# Altium PCB UmbilicalBoardV2.PcbDoc
Units mm, origin at the board's own origin, x right, y up, seen from the top; angles counter-clockwise.
Board outline 92 x 96 mm, 6 copper layers (Top Layer, GndPlane, MidLayer1, MidLayer2, PwrPlane, Bottom Layer), stack 1.174 mm thick; 34 components, 29 nets, 299 pads, 5 vias.
Unrouted connection lines stored in the file: 6.
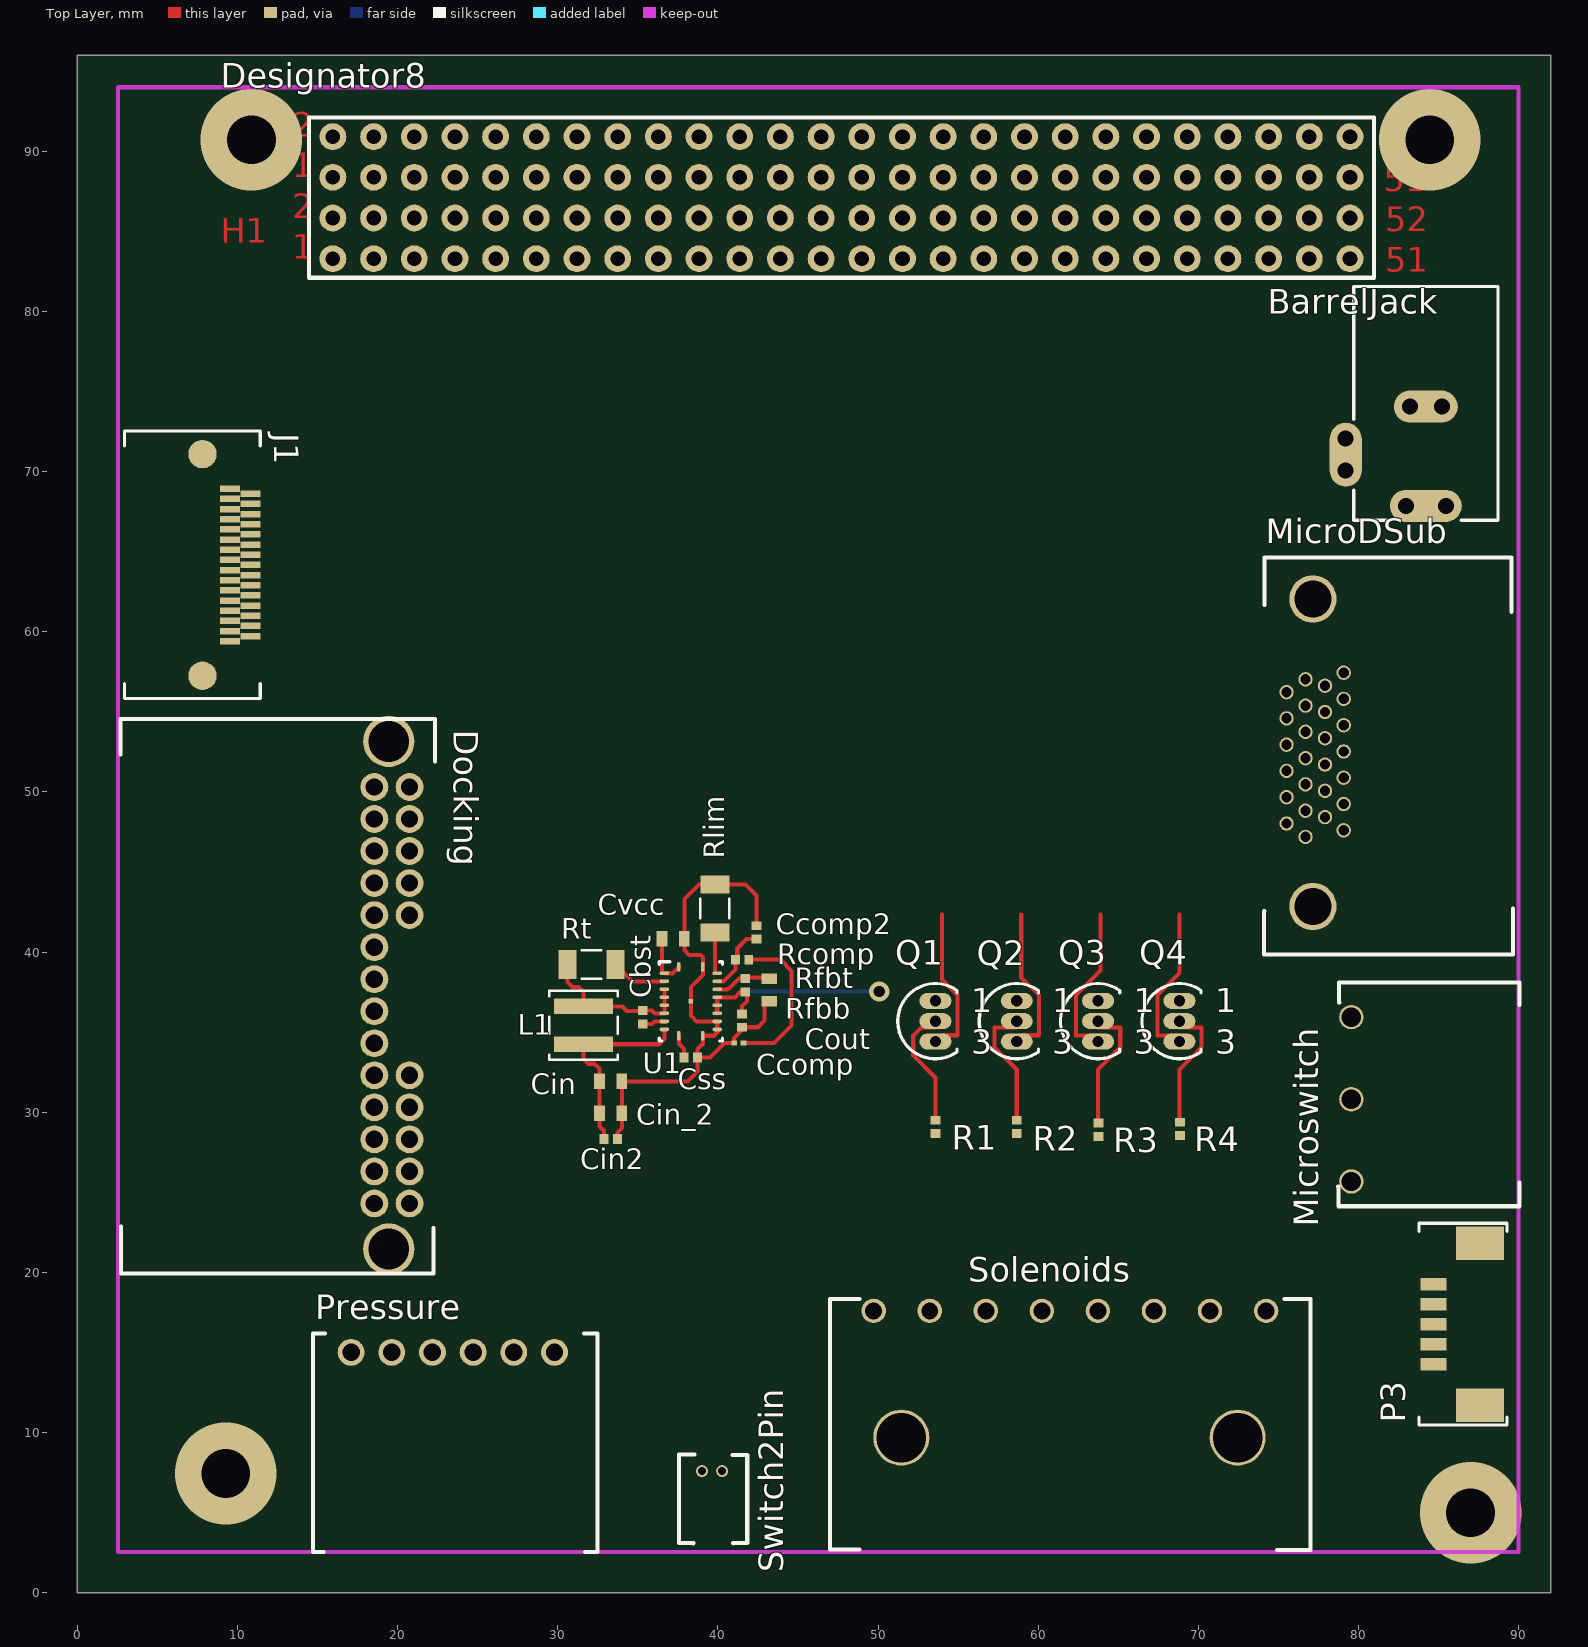
[diagram p0: Top Layer view]
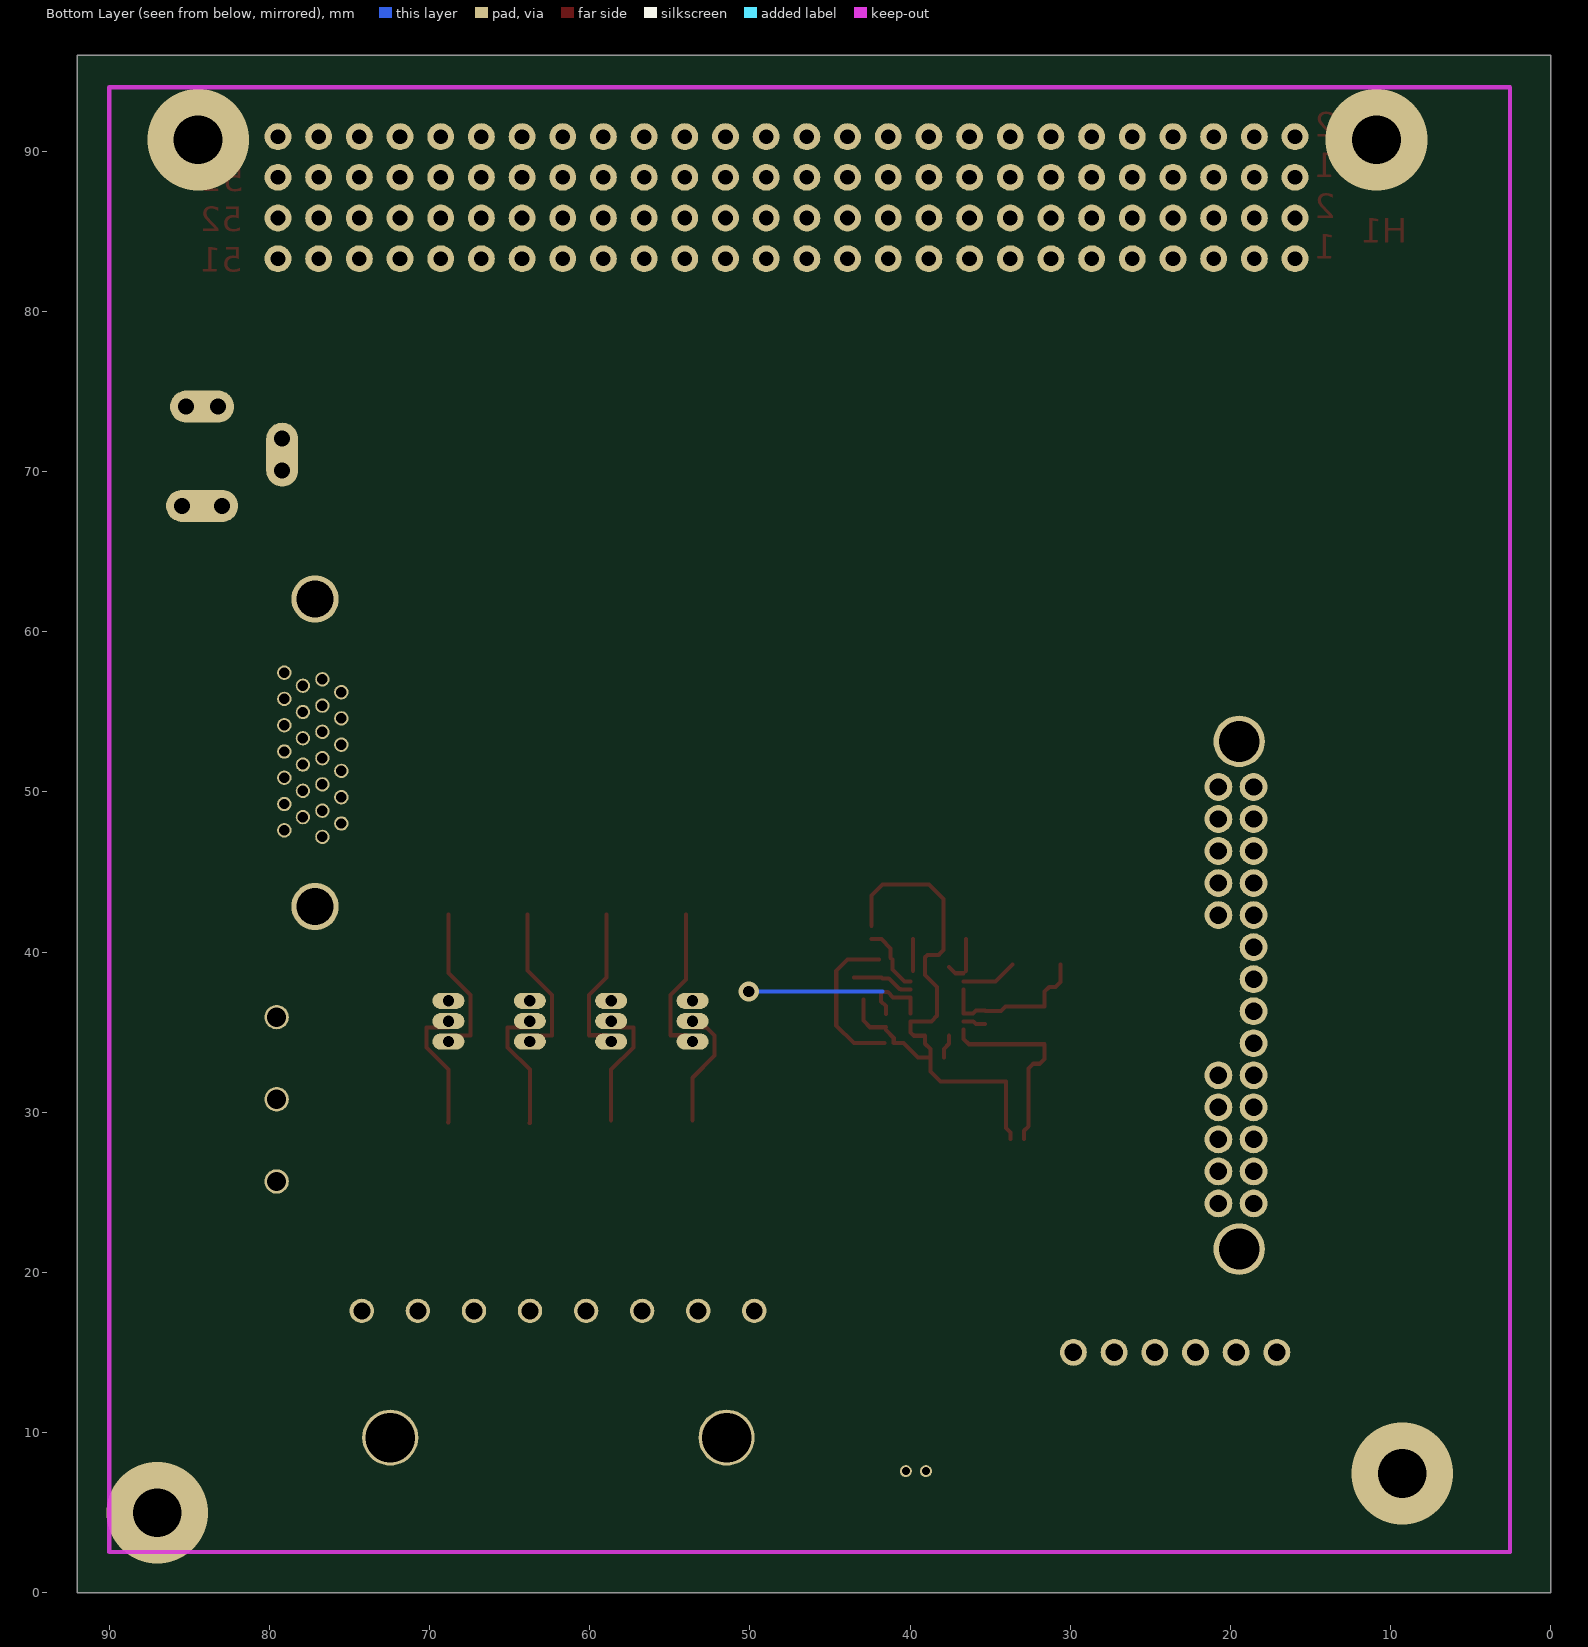
[diagram p1: Bottom Layer view, seen from below]
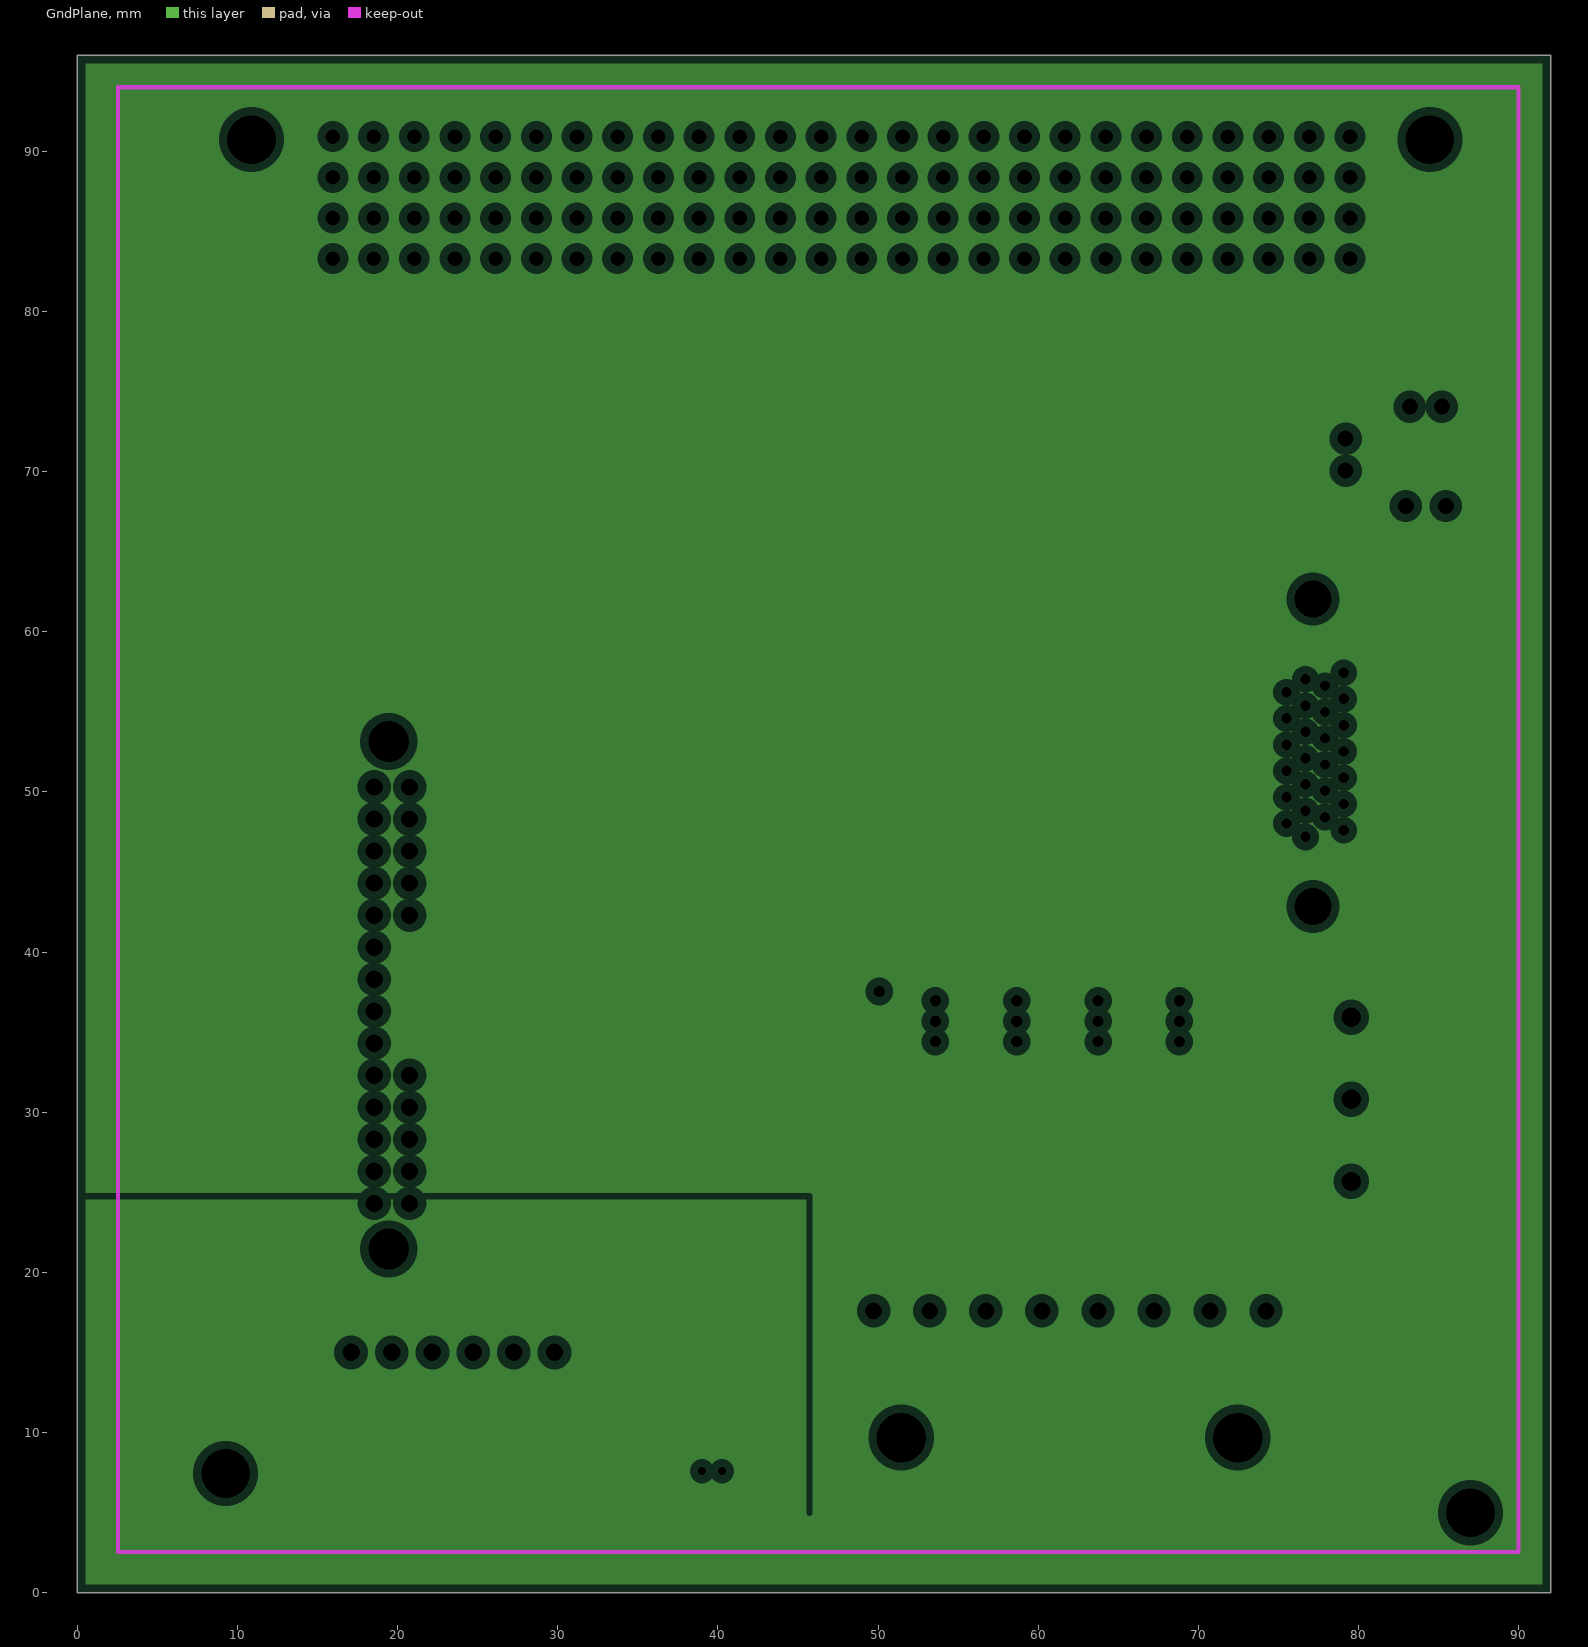
[diagram p2: GndPlane, clearances drawn from the general rule]
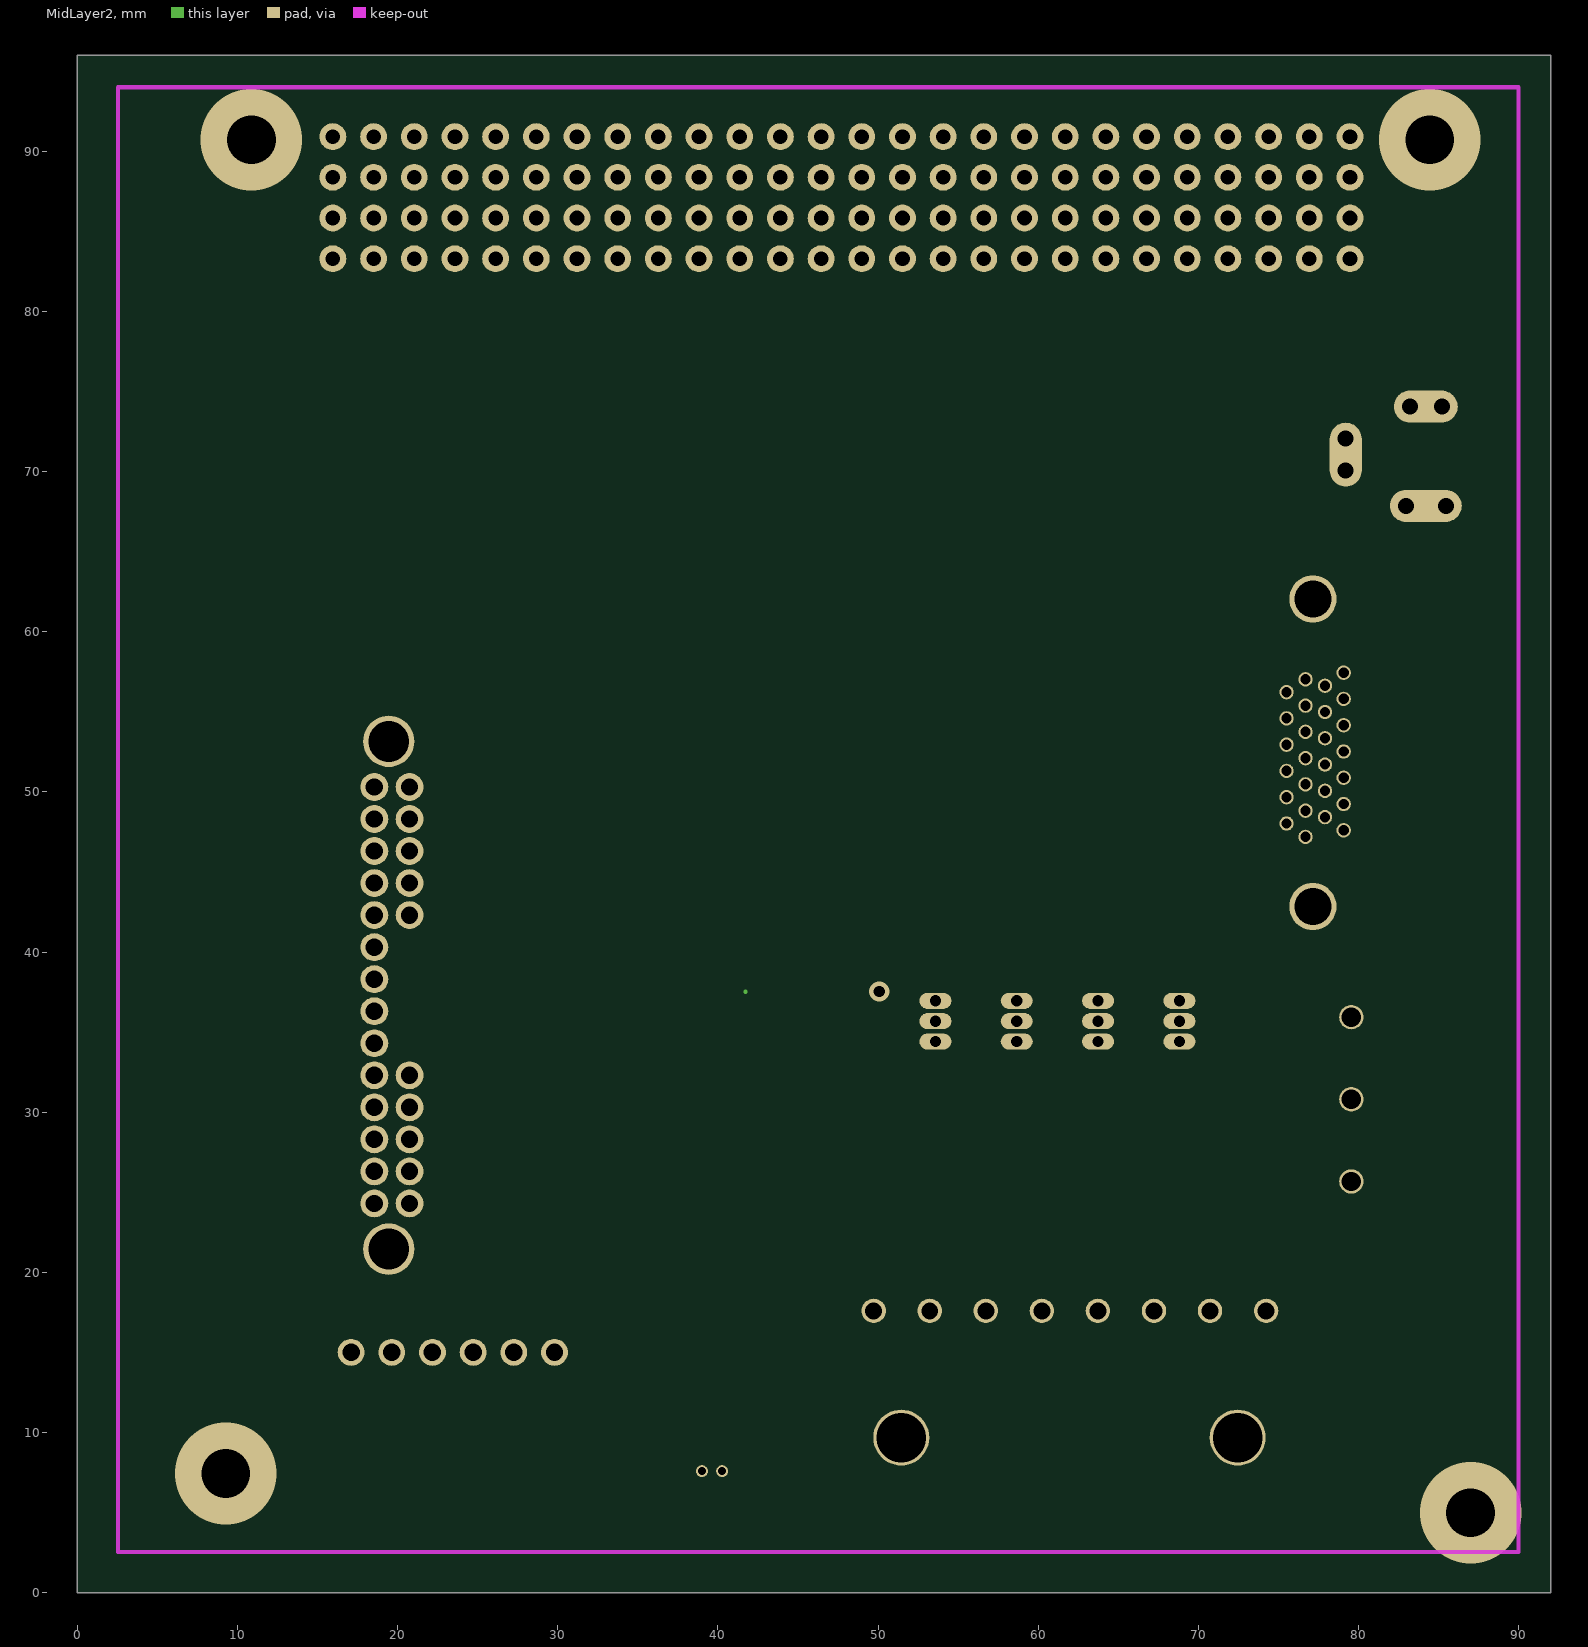
[diagram p3: MidLayer2]
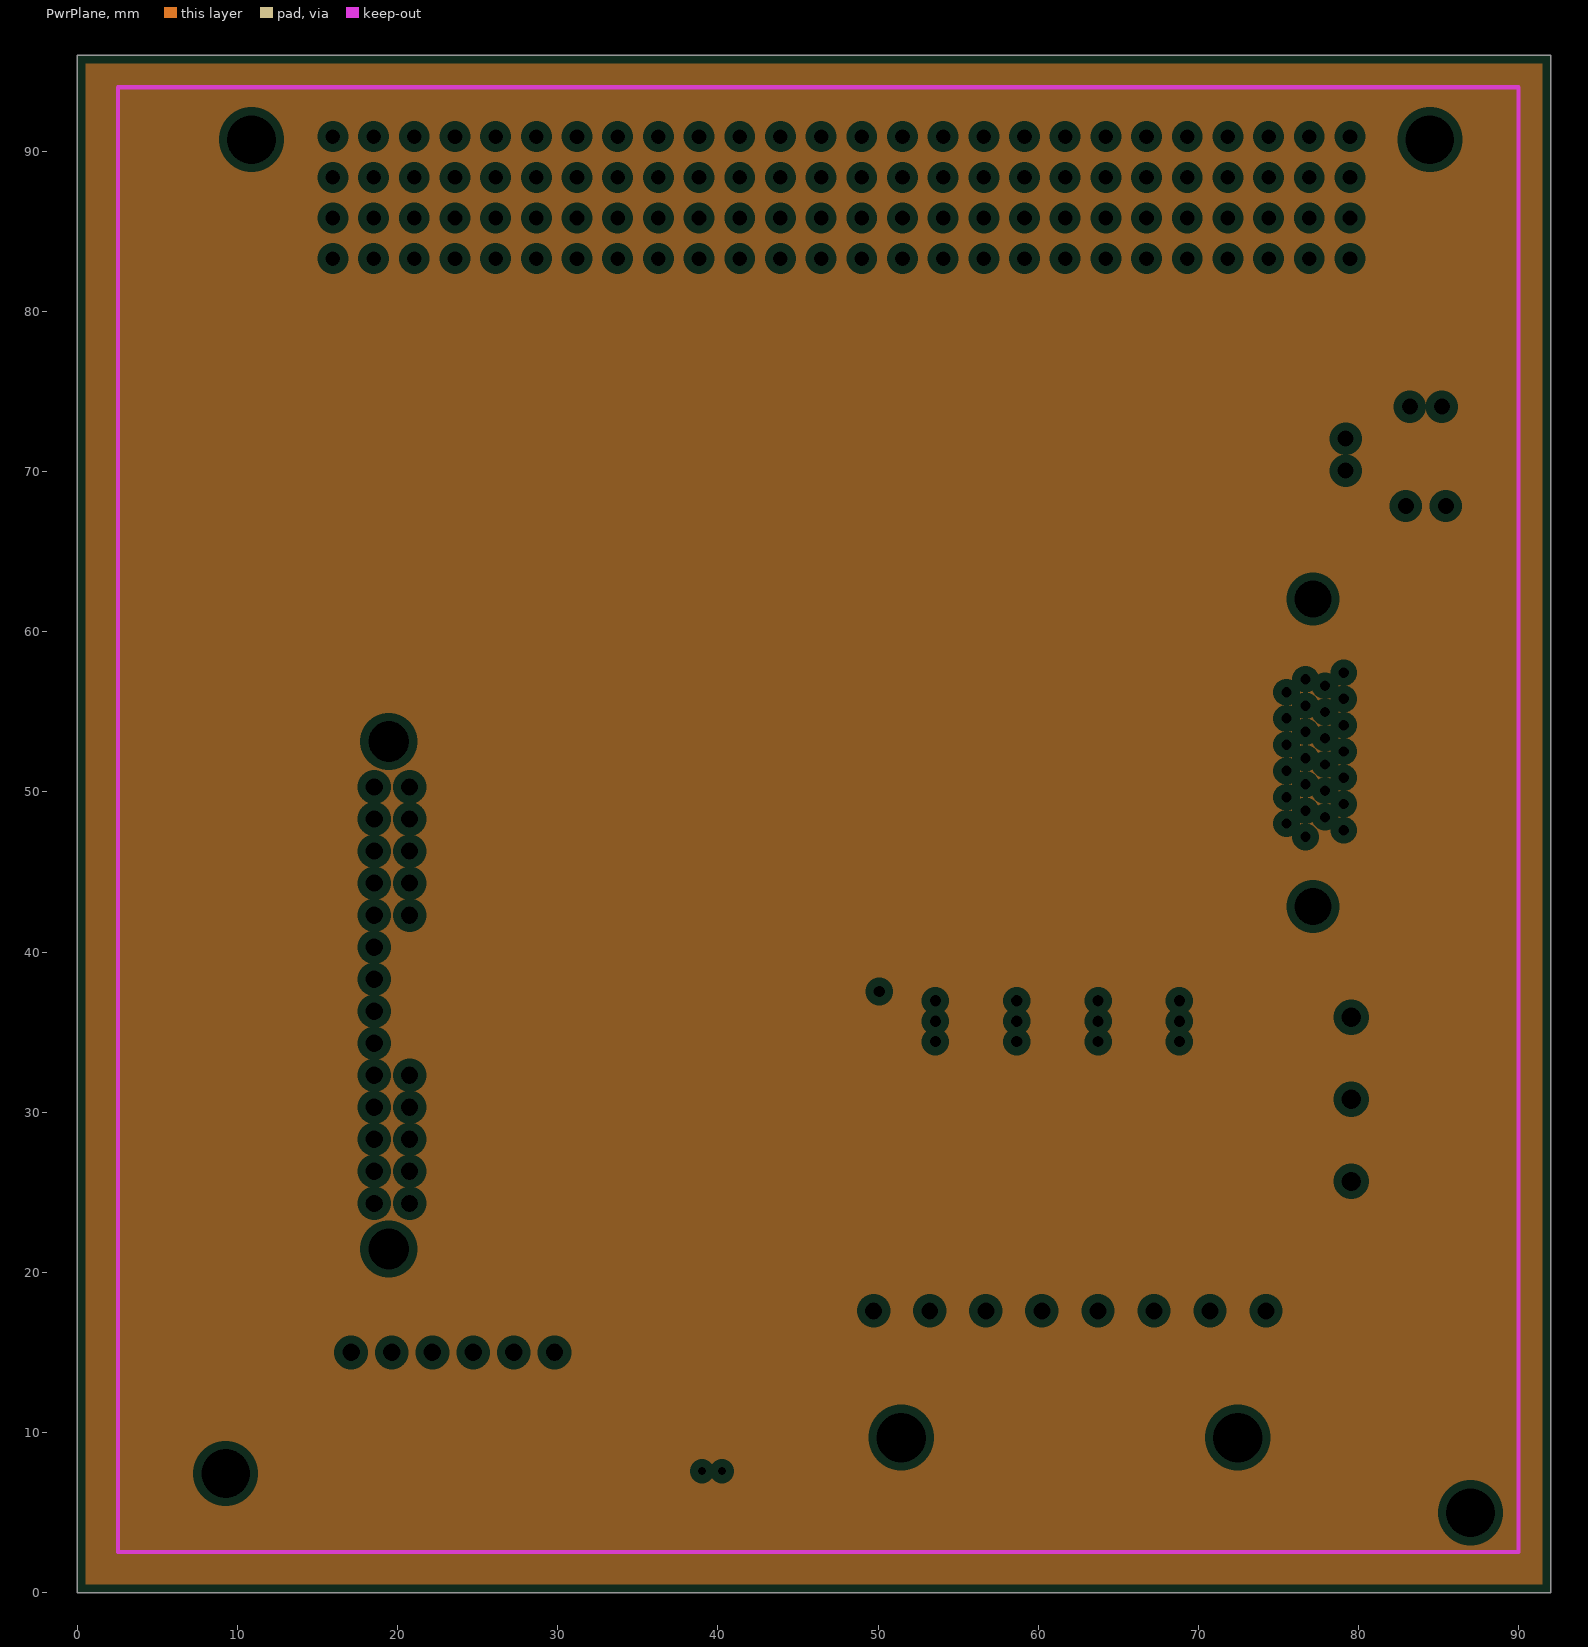
[diagram p4: PwrPlane, clearances drawn from the general rule]

## Layer stack, top to bottom
Top Solder: solder mask 0.0102, Solder Resist, Dk 3.5
Top Layer: signal copper 0.0356
Dielectric1: core 0.32, FR-4, Dk 4.8
GndPlane: plane copper 0.036, net DGND
MidLayer1: signal copper 0.0356
Dielectric2: prepreg 0.32, FR-4, Dk 4.8
MidLayer2: signal copper 0.0356
PwrPlane: plane copper 0.036
Dielectric3: core 0.32, FR-4, Dk 4.8
Bottom Layer: signal copper 0.0356
Bottom Solder: solder mask 0.0102, Solder Resist, Dk 3.5

## Board outline
0,0 0,35 0,40 0,52.019 0,65 0,70 0,96 30,96 32,96 47.6,96 63,96 65,96 92,96 92,70 92,65 92,40 92,35 92,0 65,0 60,0 35,0 30,0

## Design rules (kind name [scope] priority, off if disabled: settings)
Clearance [All] p1: gap=0.254
PlaneClearance [All] p1: clearance=0.508
PlaneConnect [All] p1: planeconnectstyle=Direct reliefexpansion=0.508 reliefentries=4 reliefconductorwidth=0.254 reliefairgap=0.254
PolygonConnect [All] p1: connectstyle=Direct reliefconductorwidth=0.254 reliefentries=4 polygonreliefangle="90 Angle" airgapwidth=0.254
RoomDefinition "Solenoid Switching" [InComponentClass('Solenoid Switching')] p1: confinementstyle=ConfineIn formatcopy=TRUE lockcomponents=FALSE outline -37.77,-93.904 31.064,-93.904 31.064,-79.426 -37.77,-79.426
RoomDefinition BoostConverter [InComponentClass('BoostConverter')] p2: confinementstyle=ConfineIn formatcopy=TRUE lockcomponents=FALSE outline -100,-100 -49.2,-100 -49.2,-74.6 -100,-74.6
RoutingVias [All] p1: holewidth=0.711 width=1.27 viastyle="Through Hole" minholewidth=0.711 minwidth=1.27 maxholewidth=0.711 maxwidth=1.27
SolderMaskExpansion [All] p1: expansion=0.102
Width [All] p1: maxlimit=0.254 minlimit=0.254 preferedwidth=0.254
28 further rules are at their usual default settings.

## Classes and differential pairs
component class "Solenoid Switching": Q1 Q2 Q3 Q4 R1
component class BoostConverter: Cbst Ccomp Ccomp2 Cin Cin2 Cin_2 Cout Css Cvcc Iout_1 L1 Rcomp Rfbb Rfbt Rlim Rt U1 Vin
component class TopSheet: BarrelJack

## Components (designator, comment, footprint, x,y, rotation, side; value= is the part's Value field where it differs from the comment)
BarrelJack "Umbilical PWR" KLD-0202 84.201,81.559 r270 top (schematic designator J2)
Cbst "C1005X5R1A104K" 1005 35.311,35.93 r270 top
Ccomp "02013A220GAT2A" 0201 41.311,34.33 r180 top
Ccomp2 "CL02C100JO2ANNC" 01005 42.411,41.23 r270 top
Cin "GRM188R61C106MA7" 0603 33.311,31.93 r0 top
Cin2 "GRM155R61C104KA8" 0402 33.311,28.33 r0 top
Cin_2 "GRM188R61C106MA7" 0603 33.311,29.93 r0 top
Cout "C3216X5R1E226M" 1005 41.511,35.73 r270 top
Css "GRM155R71C822KA0" 0402 38.311,33.43 r180 top
Cvcc "C1608X5R1A105K" 1608 37.211,40.83 r180 top
Designator8 "Comment" PC-104FOOTPRINT 15.965,83.295 r0 top locked
Docking "Part Number: 34826-0240. 24 Pin." "Docking Connector" 20.726,48.336 r270 top
J1 "XACT Connector" "Airborn Nano" 7.823,71.095 r270 top
L1 "XAL4020-601MEB" XAL4020 31.611,35.43 r90 top
MicroDSub "53048-0210 Molex Picoblade" MicroDSub 79.07,52.527 r270 top
Microswitch "USB_B" MicroSwitch_3pin 79.502,30.861 r270 top
P3 "Piksi UARTB" "Molex Picoblade 5 Pin" 89.078,10.668 r90 top
Pressure "Piksi USB" "Pressure Transducer" 22.53,14.884 r0 top
Q1 "NPN" TO-92 53.581,35.69 r0 top
Q2 "NPN" TO-92 58.661,35.69 r0 top
Q3 "NPN" TO-92 63.741,35.69 r0 top
Q4 "NPN" TO-92 68.821,35.69 r0 top
R1 "Res1" 0402 53.581,29.086 r270 top
R2 "Res1" 0402 58.661,29.086 r90 top
R3 "Res1" 0402 63.766,28.908 r90 top
R4 "Res1" 0402 68.846,28.959 r90 top
Rcomp "CRCW040249K9FKED" 0402 41.511,39.53 r0 top
Rfbb "RC0603FR-0782KL" 0603 43.211,37.63 r270 top
Rfbt "CRCW0402732KFKED" 0402 41.711,37.93 r90 top
Rlim "ERJ-8ENF1133V" 1206 39.811,42.73 r90 top
Rt "RC1206FR-0782KL" 1206 32.111,39.23 r0 top
Solenoids "Part Number: 172310-1108" "Solenoids 8Pin Right Angle" 63.729,17.602 r0 top
Switch2Pin "53048-0210 Molex Picoblade" "RemoverBeforeFlight Switch" 37.059,7.595 r0 top
U1 "TPS61088RHLR" RHL0020A 38.311,36.93 r0 top

## Footprints (in the part's own frame and the unit in brackets; to place one, negate y for a bottom-side part, rotate by r counter-clockwise, add the part's x,y. Pads: shape width x height; smd on the part's side, far side on the other; paste and mask are expansions set on the pad)
0201 [mil]
  rect 14x13 smd: 1(-11.5,0) 2(11.5,0)
0402 [mil]
  rect 22x24 smd: 1(-16.5,0) 2(16.5,0)
0603 [mil]
  rect 26x38 smd: 1(-27.5,0) 2(27.5,0)
1005 [mil]
  rect 22x24 smd: 1(-16.5,0) 2(16.5,0)
01005 [mil]
  rect 22x24 smd: 1(-16.5,0) 2(16.5,0)
1206 [mil]
  rect 44x71 smd: 1(-59,0) 2(59,0)
  silkscreen extent -24,-36 24,36
1608 [mil]
  rect 26x38 smd: 1(-27.5,0) 2(27.5,0)
"Airborn Nano" [mil] "31 Pin connector used for XACT"
  round 70 smd: 0(0,0) 32(545,0)
  rect 16x49 smd: 1(85,67.5) 2(110,67.5) 3(135,67.5) 4(160,67.5) 5(185,67.5) 6(210,67.5) 7(235,67.5) 8(260,67.5) 9(285,67.5) 10(310,67.5) 11(335,67.5) 12(360,67.5) 13(385,67.5) 14(410,67.5) 15(435,67.5) 16(460,67.5) 17(97.5,117.5) 18(122.5,117.5) 19(147.5,117.5) 20(172.5,117.5) 21(197.5,117.5) 22(222.5,117.5) 23(247.5,117.5) 24(272.5,117.5) 25(297.5,117.5) 26(322.5,117.5) 27(347.5,117.5) 28(372.5,117.5) 29(397.5,117.5) 30(422.5,117.5) 31(447.5,117.5)
  silkscreen extent -57,-192 601,142, body extent -53,-188 597,138, height 138
"Docking Connector" [mm] "Part Number: 34826-0240"
  round 1.74 hole 1.08 mask+0.076: 2(-1.975,0.025) 2(-1.975,-2.175) 2(0.025,0.025) 2(0.025,-2.175) 2(2.025,0.025) 2(2.025,-2.175) 2(4.025,0.025) 2(4.025,-2.175) 2(6.025,0.025) 2(6.025,-2.175) 2(8.025,-2.175) 2(10.025,-2.175) 2(12.025,-2.175) 2(14.025,-2.175) 2(16.025,-2.175) 2(16.025,0.025) 2(18.025,-2.175) 2(18.025,0.025) 2(20.025,-2.175) 2(20.025,0.025) 2(22.025,-2.175) 2(22.025,0.025) 2(24.025,-2.175) 2(24.025,0.025)
  round 3.21 hole 2.55 mask+0.076: 3(-4.825,-1.275) 3(26.875,-1.275)
  silkscreen extent -6.22,-18.03 28.41,1.6, body extent -6.22,-18 28.41,1.5, height 4.84
KLD-0202 [mm] "DC Power Jack, 2.5mm, KLD Series, PCB Mount"
  oval 2x4.5 all layers, no hole: 1(13.7,0)
  round 1.5 hole 1: 1A(13.7,-1.25) 1B(13.7,1.25) 2A(7.5,-1) 2B(7.5,1) 3A(9.5,-5) 3B(11.5,-5)
  oval 2x4 all layers, no hole: 2(7.5,0)
  oval 4x2 all layers, no hole: 3(10.5,-5)
  silkscreen extent 0,-4.5 14.6,4.5
MicroDSub [mm] "12226-5150-00FR"
  round 0.9 hole 0.65: 1(-4.92,0) 2(-3.28,0) 3(-1.64,0) 4(0,0) 5(1.64,0) 6(3.28,0) 7(4.92,0) 8(-4.105,-1.165) 9(-2.465,-1.165) 10(-0.825,-1.165) 11(0.815,-1.165) 12(2.455,-1.165) 13(4.095,-1.165) 14(-4.505,-2.38) 15(-2.865,-2.38) 16(-1.225,-2.38) 17(0.415,-2.38) 18(2.055,-2.38) 19(3.695,-2.38) 20(5.335,-2.38) 21(-3.705,-3.565) 22(-2.065,-3.565) 23(-0.425,-3.565) 24(1.215,-3.565) 25(2.855,-3.565) 26(4.495,-3.565)
  round 2.95 hole 2.3: 27(-9.52,-1.92) 28(9.68,-1.92)
  silkscreen extent -12.12,-4.98 12.67,10.58, body extent -12.2,-4.97 12.6,10.58, height 5
MicroSwitch_3pin [mm] "Omron Electronics Inc-EMC Div D2FS-FL-N-A1"
  round 1.524 hole 1.2: 1(-5.08,0.05) 2(0.05,0.05) 3(5.18,0.05)
  silkscreen extent -7.25,-0.77 6.73,10.55, body extent -7.25,-0.75 6.73,10.55
"Molex Picoblade 5 Pin" [mm] "Molex Picoblade Header, SMT, Right Angle"
  rect 2.1x3 smd: 1(1.05,1.5) 2(11.15,1.5)
  rect 0.8x1.6 smd: 3(3.6,4.4) 4(4.85,4.4) 5(6.1,4.4) 6(7.35,4.4) 7(8.6,4.4)
  silkscreen extent -0.2,-0.2 12.4,5.3, body extent 0.4,0 11.8,5.2, height 3.4
PC-104FOOTPRINT [mm]
  round 1.676 hole 0.914 mask+0.076: H1_1(0,0) H1_2(0,2.54) H1_3(2.54,0) H1_4(2.54,2.54) H1_5(5.08,0) H1_6(5.08,2.54) H1_7(7.62,0) H1_8(7.62,2.54) H1_9(10.16,0) H1_10(10.16,2.54) H1_11(12.7,0) H1_12(12.7,2.54) H1_13(15.24,0) H1_14(15.24,2.54) H1_15(17.78,0) H1_16(17.78,2.54) H1_17(20.32,0) H1_18(20.32,2.54) H1_19(22.86,0) H1_20(22.86,2.54) H1_21(25.4,0) H1_22(25.4,2.54) H1_23(27.94,0) H1_24(27.94,2.54) H1_25(30.48,0) H1_26(30.48,2.54) H1_27(33.02,0) H1_28(33.02,2.54) H1_29(35.56,0) H1_30(35.56,2.54) H1_31(38.1,0) H1_32(38.1,2.54) H1_33(40.64,0) H1_34(40.64,2.54) H1_35(43.18,0) H1_36(43.18,2.54) H1_37(45.72,0) H1_38(45.72,2.54) H1_39(48.26,0) H1_40(48.26,2.54) H1_41(50.8,0) H1_42(50.8,2.54) H1_43(53.34,0) H1_44(53.34,2.54) H1_45(55.88,0) H1_46(55.88,2.54) H1_47(58.42,0) H1_48(58.42,2.54) H1_49(60.96,0) H1_50(60.96,2.54) H1_51(63.5,0) H1_52(63.5,2.54) H2_1(0,5.08) H2_2(0,7.62) H2_3(2.54,5.08) H2_4(2.54,7.62) H2_5(5.08,5.08) H2_6(5.08,7.62) H2_7(7.62,5.08) H2_8(7.62,7.62) H2_9(10.16,5.08) H2_10(10.16,7.62) H2_11(12.7,5.08) H2_12(12.7,7.62) H2_13(15.24,5.08) H2_14(15.24,7.62) H2_15(17.78,5.08) H2_16(17.78,7.62) H2_17(20.32,5.08) H2_18(20.32,7.62) H2_19(22.86,5.08) H2_20(22.86,7.62) H2_21(25.4,5.08) H2_22(25.4,7.62) H2_23(27.94,5.08) H2_24(27.94,7.62) H2_25(30.48,5.08) H2_26(30.48,7.62) H2_27(33.02,5.08) H2_28(33.02,7.62) H2_29(35.56,5.08) H2_30(35.56,7.62) H2_31(38.1,5.08) H2_32(38.1,7.62) H2_33(40.64,5.08) H2_34(40.64,7.62) H2_35(43.18,5.08) H2_36(43.18,7.62) H2_37(45.72,5.08) H2_38(45.72,7.62) H2_39(48.26,5.08) H2_40(48.26,7.62) H2_41(50.8,5.08) H2_42(50.8,7.62) H2_43(53.34,5.08) H2_44(53.34,7.62) H2_45(55.88,5.08) H2_46(55.88,7.62) H2_47(58.42,5.08) H2_48(58.42,7.62) H2_49(60.96,5.08) H2_50(60.96,7.62) H2_51(63.5,5.08) H2_52(63.5,7.62)
  silkscreen extent -1.5,-1.19 65,8.81
"Pressure Transducer" [mm] "70553-0005"
  round 1.676 hole 1.09 mask+0.076: A1(-5.43,0.125) A2(-2.89,0.125) A3(-0.35,0.125) A4(2.19,0.125) A5(4.73,0.125) A6(7.27,0.125)
  Top Overlay keep-out lines w0.254: -7.158,-12.342 -7.802,-12.342 -7.802,1.311 -7.059,1.311 ; 9.12,1.295 9.945,1.295 9.945,-12.325 9.186,-12.325
  silkscreen extent -7.8,-12.34 9.95,1.31, body extent -7.83,-12.32 9.95,1.27, height 4.06
"RemoverBeforeFlight Switch" [mm] "Molex Picoblade Part Number: 53048-0210"
  round 0.75 hole 0.5: 1(1.95,0) 2(3.205,0)
  silkscreen extent 0.53,-4.5 4.78,1.05, body extent 0.53,-4.47 4.78,1.03, height 4.05
RHL0020A [mm]
  oval 0.24x0.6 smd: 1(-0.75,2.15) 10(-0.75,-2.15) 11(0.75,-2.15) 20(0.75,2.15)
  oval 0.6x0.24 smd: 2(-1.65,1.75) 3(-1.65,1.25) 4(-1.65,0.75) 5(-1.65,0.25) 6(-1.65,-0.25) 7(-1.65,-0.75) 8(-1.65,-1.25) 9(-1.65,-1.75) 12(1.65,-1.75) 13(1.65,-1.25) 14(1.65,-0.75) 15(1.65,-0.25) 16(1.65,0.25) 17(1.65,0.75) 18(1.65,1.25) 19(1.65,1.75)
  rect 0.3x0.3 smd: 21(0,0)
  silkscreen extent -1.98,-2.47 1.98,2.47
"Solenoids 8Pin Right Angle" [mm] "New Solenoid 8 Pin. Part Number: 172310-1108"
  round 1.524 hole 1.06: 1(-14,0) 2(-10.5,0) 3(-7,0) 4(-3.5,0) 5(0,0) 6(3.5,0) 7(7,0) 8(10.5,0)
  round 3.5 hole 3.09: 1(-12.275,-7.91) 1(8.725,-7.91)
  silkscreen extent -16.72,-14.92 13.28,0.75, body extent -16.72,-14.89 13.28,0.74, height 6.06
TO-92 [mm] "TO, Flat Index; 3 In-Line, Axial Leads; Body Dia. 4.6mm; Leads 0.41 x 0.39 mm (max)"
  oval 2x1 hole 0.7: 1(0,1.27) 2(0,0) 3(0,-1.27)
  silkscreen extent -2.34,-2.34 1.35,2.34
XAL4020 [mil]
  rect 38x146 smd: 1(-46.5,0) 2(46.5,0)
  silkscreen extent -84,-84 84,84

## Part data
BarrelJack: library part PWR2.5, "Low Voltage Power Supply Connector"
Cbst Ccomp Ccomp2 Cin Cin2 Cin_2 Cout Css Cvcc L1 Rcomp Rfbb Rfbt Rlim Rt: "Imported"
Q1 Q2 Q3 Q4: "NPN Bipolar Transistor"
R1 R2 R3 R4: "Resistor"

## Via types
v1: diameter 6.35, hole 3.048, Top Layer to Bottom Layer, 4 vias
v2: diameter 1.27, hole 0.711, Top Layer to Bottom Layer, 1 vias

## Nets (pads, with @x,y where several pads share a name; then routed paths per layer and width w, separated by ;. In a path a pad name is that pad's centre, name@x,y a point inside that pad or via, vN(x,y) a via of type N, cw(c..) or ccw(c..) an arc to the next point about the centre after c; other vN are vias at no path point)
0: Ccomp2.1 Ccomp.2 Cin2.2 Cin.2 Cin_2.2 Cout.2 Css.1 Cvcc.1 Rfbb.2 Rlim.2 U1.11 U1.12 U1.13 U1.20 U1.21 | length 36.6
  Top Layer w0.254: Cin2.2 33.73,28.749 34.009,29.028 Cin_2.2 Cin.2 38.111,31.93 38.73,32.549 Css.1 ; U1.13 U1.12 39.961,34.98 39.761,34.78 U1.11 39.061,34.28 38.73,33.949 Css.1 ; U1.13 38.661,35.68 38.311,36.03 U1.21 38.311,37.83 39.061,38.58 U1.20 39.061,39.68 38.911,39.83 38.211,39.83 37.909,40.131 Cvcc.1 37.909,43.328 38.809,44.228 Rlim.2 41.712,44.228 42.411,43.53 Ccomp2.1 ; Cout.2@41.511,35.13 41.018,34.637 Ccomp.2 40.411,34.33 39.511,33.43 Css.1 ; Cout.2 42.491,35.311 42.911,35.73 Rfbb.2@42.911,37.031
AGND: 
DGND: Q1.3 Q2.3 Q3.3 Q4.3
NetCbst_1: Cbst.1 L1.2 Rt.1 U1.4 U1.5 U1.6 U1.7 | length 10
  Top Layer w0.254: Rt.1 30.612,38.128 30.911,37.83 31.311,37.83 31.611,37.53 L1.2 34.03,36.611 34.311,36.33 35.292,36.33 Cbst.1 35.891,36.349 36.06,36.181 U1.7 U1.6 U1.5 U1.4
NetCbst_2: Cbst.2 U1.8 | length 1.4
  Top Layer w0.254: Cbst.2 35.891,35.511 36.054,35.673 36.265,35.673 ; 36.272,35.68 U1.8
NetCcomp2_2: Ccomp2.2 Rcomp.1 U1.18 | length 4.1
  Top Layer w0.254: U1.18 40.349,38.18 40.361,38.18 41.091,38.91 Rcomp.1 ; Rcomp.1@41.211,39.649 41.211,40.23 41.791,40.811 Ccomp2.2
NetCcomp_1: Ccomp.1 Rcomp.2 | length 9.8
  Top Layer w0.254: Ccomp.1 43.511,34.33 44.611,35.43 44.611,38.83 43.911,39.53 Rcomp.2
NetCin2_1: Cin2.1 Cin.1 Cin_2.1 L1.1 U1.9 | length 12.5
  Top Layer w0.254: Cin2.1 32.891,28.849 32.612,29.128 Cin_2.1 Cin.1 32.612,32.728 32.311,33.03 31.911,33.03 31.611,33.33 L1.1 36.33,34.249 36.661,34.58 U1.9@36.661,35.172
NetCout_1: Cout.1 Rfbt.1 U1.14 U1.15 U1.16 | length 12.7
  Top Layer w0.254: U1.14 U1.15 39.961,37.179 41.061,37.18 41.391,37.511 Rfbt.1 ; Cout.1 41.511,36.63 41.811,36.93 Rfbt.1@41.811,37.411
  MidLayer2 w0.254: 41.719,37.518 41.719,37.544
  Bottom Layer w0.254: 41.709,37.544 v2(50.075,37.544)
NetCss_2: Css.2 U1.10 | length 1.5
  Top Layer w0.254: U1.10 37.561,34.28 37.891,33.949 Css.2
NetCvcc_2: Cvcc.2 U1.1 U1.2 | length 3.1
  Top Layer w0.254: 36.512,38.836 Cvcc.2 ; U1.2 37.161,38.68 U1.1
NetJ2_1: BarrelJack.1 BarrelJack.1A BarrelJack.1B
NetJ2_2: BarrelJack.2 BarrelJack.2A BarrelJack.2B
NetJ2_3: BarrelJack.3 BarrelJack.3A BarrelJack.3B
NetQ1_1: Q1.1 | length 9.5
  Top Layer w0.254: 53.581,34.42 53.97,34.809 54.962,34.809 54.962,37.325 54,38.286 54,42.359
NetQ1_2: Q1.2 R1.1 | length 7.8
  Top Layer w0.254: R1.1 53.581,32.158 52.2,33.539 52.2,34.785 52.716,35.301 53.581,35.301 Q1.2
NetQ2_1: Q2.1 | length 9.6
  Top Layer w0.254: 58.661,34.42 58.94,34.699 58.94,34.809 60.042,34.809 60.042,37.325 58.94,38.426 58.94,42.359
NetQ2_2: Q2.2 R2.2 | length 8.1
  Top Layer w0.254: R2.2 58.661,32.674 57.28,34.055 57.28,35.301 58.661,35.301 Q2.2
NetQ3_1: Q3.1 | length 10.1
  Top Layer w0.254: 63.741,34.42 63.88,34.559 63.88,34.793 62.36,34.793 62.36,37.325 63.88,38.845 63.88,42.359
NetQ3_2: Q3.2 R3.2 | length 8.3
  Top Layer w0.254: Q3.2 63.741,35.301 65.122,35.301 65.122,34.055 63.741,32.674 63.741,29.327 R3.2
NetQ4_1: Q4.1 | length 9.9
  Top Layer w0.254: 68.821,34.42 68.821,34.793 67.44,34.793 67.44,37.325 68.821,38.706 68.821,42.359
NetQ4_2: Q4.2 R4.2 | length 8.3
  Top Layer w0.254: Q4.2 68.821,35.301 70.202,35.301 70.202,34.055 68.821,32.674 68.821,29.378 R4.2
NetR1_2: R1.2
NetR2_1: R2.1
NetR3_1: R3.1
NetR4_1: R4.1
NetRfbb_1: Rfbb.1 Rfbt.2 U1.17 | length 3.9
  Top Layer w0.254: U1.17 40.579,37.68 ; 40.587,37.688 40.669,37.688 41.33,38.349 Rfbt.2 ; Rfbt.2@41.79,38.428 42.711,38.428 ; Rfbb.1@42.911,38.428 42.711,38.428 ; Rfbb.1@43.511,38.428 42.711,38.428
NetRlim_1: Rlim.1 U1.19 | length 2
  Top Layer w0.254: 39.811,38.838 Rlim.1@39.811,40.831
NetRt_2: Rt.2 U1.3 | length 3.5
  Top Layer w0.254: Rt.2 34.659,38.18 36.272,38.18 U1.3
pads on no net: Designator8.H1_1 Designator8.H1_2 Designator8.H1_3 Designator8.H1_4 Designator8.H1_5 Designator8.H1_6 Designator8.H1_7 Designator8.H1_8 Designator8.H1_9 Designator8.H1_10 Designator8.H1_11 Designator8.H1_12 Designator8.H1_13 Designator8.H1_14 Designator8.H1_15 Designator8.H1_16 Designator8.H1_17 Designator8.H1_18 Designator8.H1_19 Designator8.H1_20 Designator8.H1_21 Designator8.H1_22 Designator8.H1_23 Designator8.H1_24 Designator8.H1_25 Designator8.H1_26 Designator8.H1_27 Designator8.H1_28 Designator8.H1_29 Designator8.H1_30 Designator8.H1_31 Designator8.H1_32 Designator8.H1_33 Designator8.H1_34 Designator8.H1_35 Designator8.H1_36 Designator8.H1_37 Designator8.H1_38 Designator8.H1_39 Designator8.H1_40 Designator8.H1_41 Designator8.H1_42 Designator8.H1_43 Designator8.H1_44 Designator8.H1_45 Designator8.H1_46 Designator8.H1_47 Designator8.H1_48 Designator8.H1_49 Designator8.H1_50 Designator8.H1_51 Designator8.H1_52 Designator8.H2_1 Designator8.H2_2 Designator8.H2_3 Designator8.H2_4 Designator8.H2_5 Designator8.H2_6 Designator8.H2_7 Designator8.H2_8 Designator8.H2_9 Designator8.H2_10 Designator8.H2_11 Designator8.H2_12 Designator8.H2_13 Designator8.H2_14 Designator8.H2_15 Designator8.H2_16 Designator8.H2_17 Designator8.H2_18 Designator8.H2_19 Designator8.H2_20 Designator8.H2_21 Designator8.H2_22 Designator8.H2_23 Designator8.H2_24 Designator8.H2_25 Designator8.H2_26 Designator8.H2_27 Designator8.H2_28 Designator8.H2_29 Designator8.H2_30 Designator8.H2_31 Designator8.H2_32 Designator8.H2_33 Designator8.H2_34 Designator8.H2_35 Designator8.H2_36 Designator8.H2_37 Designator8.H2_38 Designator8.H2_39 Designator8.H2_40 Designator8.H2_41 Designator8.H2_42 Designator8.H2_43 Designator8.H2_44 Designator8.H2_45 Designator8.H2_46 Designator8.H2_47 Designator8.H2_48 Designator8.H2_49 Designator8.H2_50 Designator8.H2_51 Designator8.H2_52 Docking.2 Docking.3 J1.0 J1.1 J1.2 J1.3 J1.4 J1.5 J1.6 J1.7 J1.8 J1.9 J1.10 J1.11 J1.12 J1.13 J1.14 J1.15 J1.16 J1.17 J1.18 J1.19 J1.20 J1.21 J1.22 J1.23 J1.24 J1.25 J1.26 J1.27 J1.28 J1.29 J1.30 J1.31 J1.32 MicroDSub.1 MicroDSub.2 MicroDSub.3 MicroDSub.4 MicroDSub.5 MicroDSub.6 MicroDSub.7 MicroDSub.8 MicroDSub.9 MicroDSub.10 MicroDSub.11 MicroDSub.12 MicroDSub.13 MicroDSub.14 MicroDSub.15 MicroDSub.16 MicroDSub.17 MicroDSub.18 MicroDSub.19 MicroDSub.20 MicroDSub.21 MicroDSub.22 MicroDSub.23 MicroDSub.24 MicroDSub.25 MicroDSub.26 MicroDSub.27 MicroDSub.28 Microswitch.1 Microswitch.2 Microswitch.3 P3.1 P3.2 P3.3 P3.4 P3.5 P3.6 P3.7 Pressure.A1 Pressure.A2 Pressure.A3 Pressure.A4 Pressure.A5 Pressure.A6 Solenoids.1 Solenoids.2 Solenoids.3 Solenoids.4 Solenoids.5 Solenoids.6 Solenoids.7 Solenoids.8 Switch2Pin.1 Switch2Pin.2
copper on no net:
  other v1: 87,5 9.271,7.442 10.875,90.725 84.45,90.725

## Polygon pours and split planes (outlines as drawn)
AGND on GndPlane (split plane): 91.49,70 91.49,65 91.49,40 91.49,35 91.49,0.51 65,0.51 60,0.51 35,0.51 30,0.51 0.51,0.51 0.51,24.563 45.518,24.563 45.518,5 45.525,4.948 45.545,4.899 45.577,4.857 45.619,4.825 45.668,4.805 45.72,4.798 45.772,4.805 45.821,4.825 45.863,4.857 45.895,4.899 45.915,4.948 45.922,5 45.922,24.765 45.915,24.817 45.895,24.866 45.863,24.908 45.821,24.94 45.772,24.96 45.72,24.967 0.51,24.967 0.51,35 0.51,40 0.51,52.019 0.51,65 0.51,70 0.51,95.49 91.49,95.49
no net on PwrPlane (split plane): 91.49,70 91.49,65 91.49,40 91.49,35 91.49,0.51 65,0.51 60,0.51 35,0.51 30,0.51 0.51,0.51 0.51,35 0.51,40 0.51,52.019 0.51,65 0.51,70 0.51,95.49 91.49,95.49

## Keep-outs
Keep-Out Layer:
  lines w0.254: 2.54,2.54 90,2.54 90,94 2.54,94 2.54,2.54

## Other copper
Top Layer:
  rectangle: -100,-100 -98.5,-98.1
GndPlane (plane layer: these items are gaps in the copper):
  lines w0.4: 0.51,24.765 8.153,24.765 44.704,24.765 ; 44.501,24.765 45.364,24.765 45.72,24.765 ; 45.542,24.765 45.72,24.765 ; 45.72,5 45.72,24.765

## Silkscreen, mask and mechanical layers (free items; w line width, h text height)
Mechanical 1:
  lines w0.254: 30,0 0,0 0,35 0,51.25 0,53.75 0,64.618 0,70 0,96 30,96 32,94 63,94 65,96 92,96 92,70 ; 35,5 60,5 ; 65,0 92,0 92,35 ; 87,40 87,65

## Dimensions
87,5 to 7,5 on Dimensions
84.45,90.725 to 10.875,90.725 on Dimensions
84.45,90.725 to 10.875,90.725 on Dimensions
87,5 to 84.45,90.725 on Dimensions
84.45,90.725 to 87,5 on Dimensions
7,5 to 87,5 on Dimensions
0,35 to 87,5 on Dimensions
0,35 to 86,5 on Dimensions
90,2.54 to 90,94 on Dimensions
0,35 to 0,40 on Dimensions
92,1 to 0,0 on Dimensions
2.54,2.54 to 90,2.54 on Dimensions
10.875,90.725 to 15.965,83.295 on Dimensions
10.875,90.725 to 15.965,83.295 on Dimensions

## Text inside footprints (layer, text, board x,y; h text height)
BarrelJack: Mechanical 1 "Alert PCB fab to slot details" at 90.267,81.273 h0.3 r270; Mechanical 1 "Assign keep-out area to slot" at 90.767,81.273 h0.3 r270; Mechanical 1 "Mech 1 - Slot cut-out" at 89.767,81.273 h0.3 r270; Mechanical 1 "Mech 2 - Clearance, move to internal plane if present" at 89.267,81.273 h0.3 r270
Designator8: Mechanical 1 "J1" at 55.372,87.189 h0.76; Top Layer "H1" at 8.965,84.295 h1.52; Top Layer "H2" at 8.965,88.295 h1.52; Top Layer "1" at 13.425,83.295 h1.52; Top Layer "2" at 13.425,85.835 h1.52; Top Layer "1" at 13.425,88.375 h1.52; Top Layer "2" at 13.425,90.915 h1.52; Top Layer "51" at 81.665,82.495 h1.52; Top Layer "52" at 81.665,84.995 h1.52; Top Layer "51" at 81.565,87.495 h1.52; Top Layer "52" at 81.565,89.995 h1.52
Q1: Top Overlay "3" at 55.805,33.655 h1.5; Top Overlay "1" at 55.805,36.25 h1.5
Q2: Top Overlay "3" at 60.885,33.655 h1.5; Top Overlay "1" at 60.885,36.25 h1.5
Q3: Top Overlay "3" at 65.965,33.655 h1.5; Top Overlay "1" at 65.965,36.25 h1.5
Q4: Top Overlay "3" at 71.045,33.655 h1.5; Top Overlay "1" at 71.045,36.25 h1.5